# Altium PCB LVDS2RGB.PcbDoc
Units mm, origin at the board's own origin, x right, y up, seen from the top; angles counter-clockwise.
Board outline 34.16 x 35.56 mm, 2 copper layers (Top Layer, Bottom Layer); 35 components, 62 nets, 174 pads, 20 vias.
Unrouted connection lines stored in the file: 35.
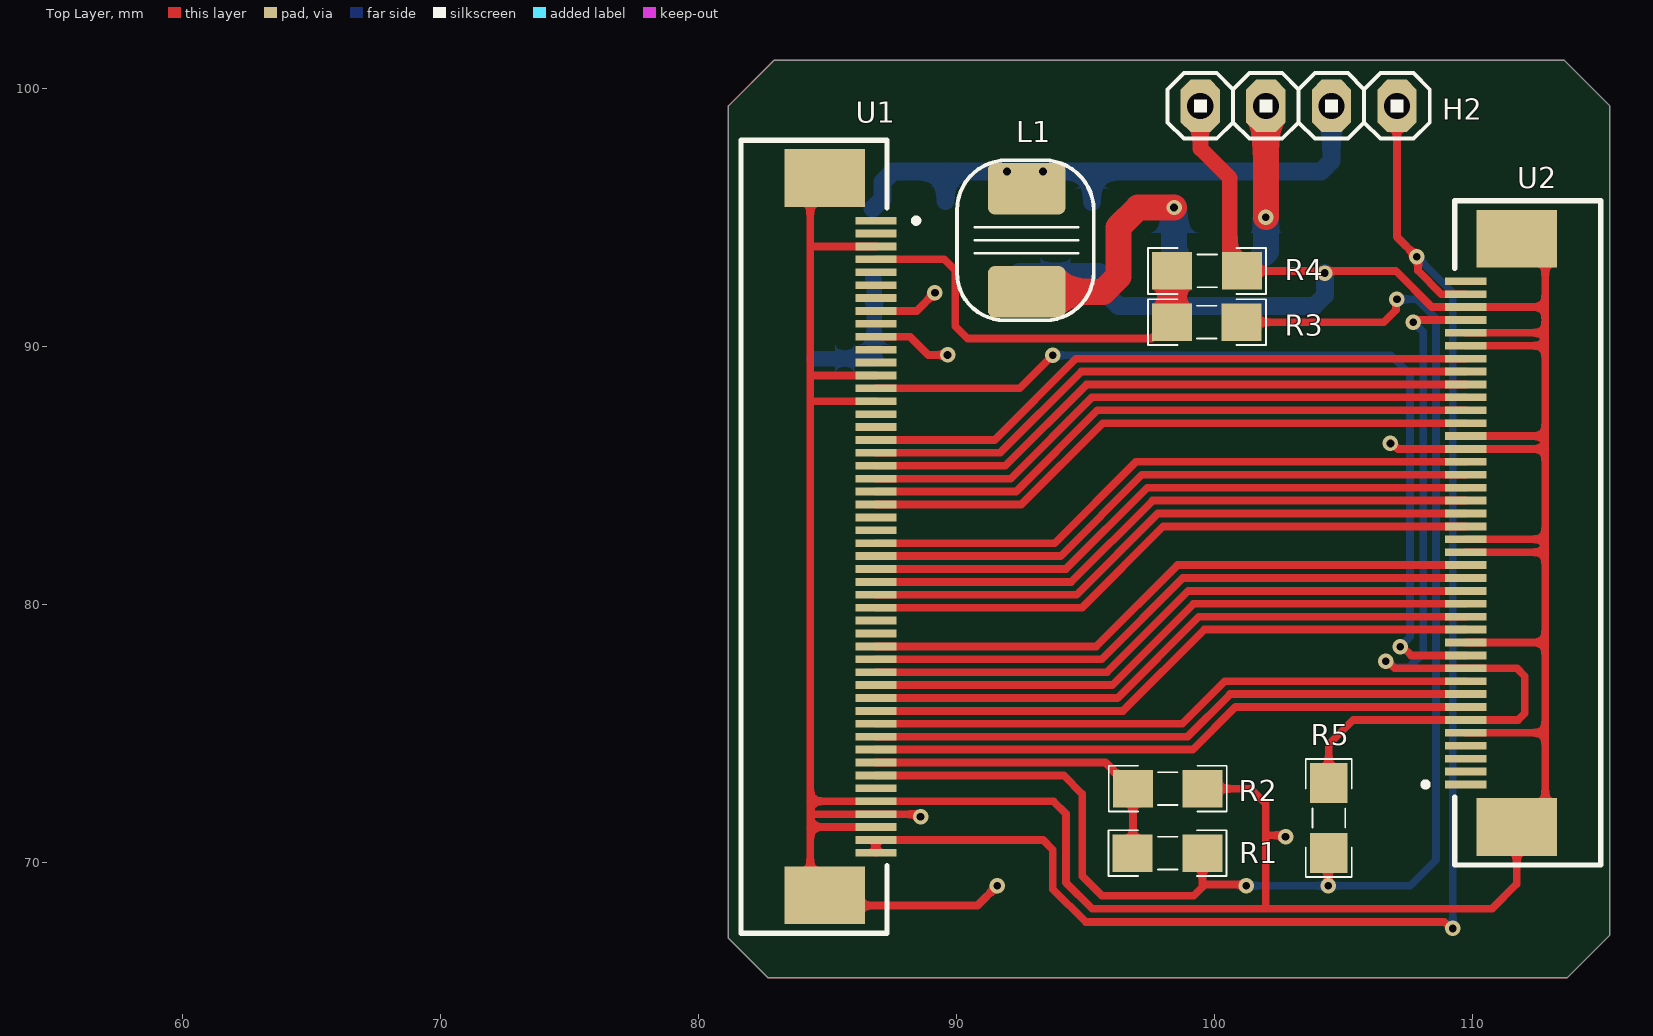
[diagram p0: Top Layer view]
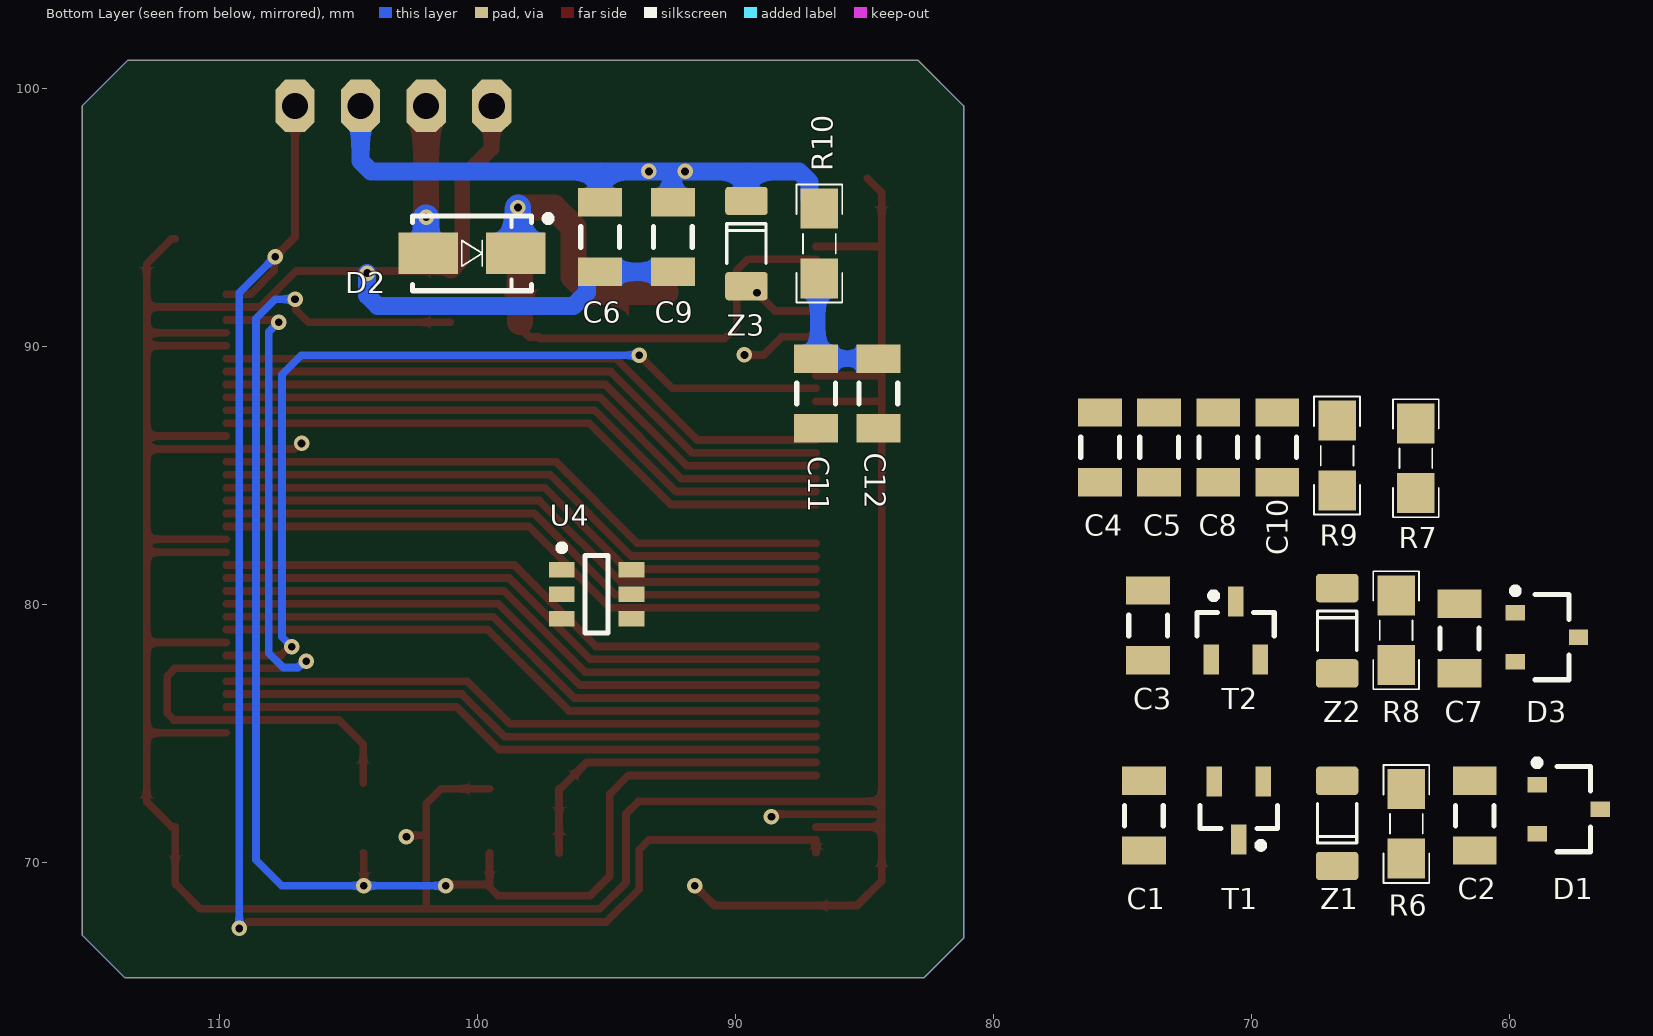
[diagram p1: Bottom Layer view, seen from below]

## Layer stack, top to bottom
Top Solder: solder mask 0.0102, Solder Resist, Dk 3.5
Top Layer: signal copper 0.0356
Dielectric 1: dielectric 0.32, FR-4, Dk 4.8
Bottom Layer: signal copper 0.0356
Bottom Solder: solder mask 0.0102, Solder Resist, Dk 3.5

## Board outline
81.153,67.056 82.677,65.532 113.665,65.532 115.316,67.183 115.316,99.314 113.538,101.092 82.931,101.092 81.153,99.314

## Design rules (kind name [scope] priority, off if disabled: settings)
Clearance [All] p1: gap=0.2 ignorepadtopadclearanceinfootprint=FALSE except(0.4: Arc-Fill Arc-Poly Arc-Region Track-Fill Track-Poly Track-Region SMDPad-Fill SMDPad-Poly SMDPad-Region THPad-Fill THPad-Poly THPad-Region Via-Fill Via-Poly Via-Region Fill-Fill Fill-Poly Fill-Region Poly-Poly Poly-Region Region-Region)
ComponentClearance [All] p1 off: gap=0.254 collisioncheckmode=3 verticalgap=0.254 showdistances=FALSE
PolygonConnect [All] p1: connectstyle=Relief reliefconductorwidth=0.254 reliefentries=4 polygonreliefangle="90 Angle" airgapwidth=0.254
RoutingVias [All] p1: holewidth=0.6 width=0.3 viastyle="Through Hole" minholewidth=0.1 minwidth=0.1 maxholewidth=10 maxwidth=10
SolderMaskExpansion [All] p1: expansion=0.102 istentingtop=FALSE
Width [All] p1: maxlimit=10 minlimit=0.1 preferedwidth=0.3
29 further rules are at their usual default settings.

## Components (designator, comment, footprint, x,y, rotation, side; value= is the part's Value field where it differs from the comment)
C1 "Comment" MY_CAP_SMD_1206 74.168,71.809 r90 bottom
C2 "Comment" MY_CAP_SMD_1206 61.341,71.809 r270 bottom
C3 "Comment" MY_CAP_SMD_1206 74,79.183 r270 bottom
C4 "Comment" MY_CAP_SMD_1206 75.864,86.084 r90 bottom
C5 "Comment" MY_CAP_SMD_1206 73.575,86.084 r90 bottom
C6 "Comment" MY_CAP_SMD_1206 95.241,94.234 r90 bottom
C7 "Comment" MY_CAP_SMD_1206 61.935,78.675 r270 bottom
C8 "Comment" MY_CAP_SMD_1206 71.285,86.084 r90 bottom
C9 "Comment" MY_CAP_SMD_1206 92.417,94.234 r90 bottom
C10 "Comment" MY_CAP_SMD_1206 68.996,86.084 r90 bottom
C11 "Comment" MY_CAP_SMD_1206 86.868,88.169 r90 bottom
C12 "Comment" MY_CAP_SMD_1206 84.455,88.169 r90 bottom
D1 "Comment" SOT95P230X110-3N 57.703,72.061 r180 bottom
D2 "Comment" DIOM4629X24N 100.203,93.599 r180 bottom
D3 "Comment" SOT95P230X110-3N 58.547,78.723 r180 bottom
H2 "Comment" My_1X04 103.251,99.314 r0 top
L1 "Comment" "Inductor SMD 3x3.2mm" 92.71,94.107 r90 top
R1 "Comment" RESC3413X04N 98.171,70.358 r0 top
R2 "Comment" RESC3413X04N 98.179,72.853 r0 top
R3 "Comment" RESC3413X04N 99.695,90.932 r0 top
R4 "Comment" RESC3413X04N 99.703,92.919 r0 top
R5 "Comment" RESC3413X04N 104.419,71.718 r90 top
R6 "Comment" RESC3413X04N 63.993,71.49 r90 bottom
R7 "Comment" RESC3413X04N 63.627,85.661 r270 bottom
R8 "Comment" RESC3413X04N 64.389,78.994 r270 bottom
R9 "Comment" RESC3413X04N 66.678,85.765 r270 bottom
R10 "Comment" RESC3413X04N 86.741,93.98 r90 bottom
T1 "Comment" SOT23_N 70.485,72.009 r270 bottom
T2 "Comment" SOT23_N 70.612,78.983 r90 bottom
U1 "Comment" SAMTEC_ZF5S-50-01-T-WT 84.888,82.618 r270 top locked
U2 "Comment" SAMTEC_ZF5S-40-02-T-WT 111.708,82.769 r90 top locked
U4 "Comment" MT368 95.377,80.391 r180 bottom
Z1 "Comment" "SOD80, LL-34" 66.675,71.509 r90 bottom
Z2 "Comment" "SOD80, LL-34" 66.675,78.975 r270 bottom
Z3 "Comment" "SOD80, LL-34" 89.568,93.98 r270 bottom

## Footprints (in the part's own frame and the unit in brackets; to place one, negate y for a bottom-side part, rotate by r counter-clockwise, add the part's x,y. Pads: shape width x height; smd on the part's side, far side on the other; paste and mask are expansions set on the pad)
DIOM4629X24N [mm] "Molded Diode, 2-Leads, Body 4/60x2/90mm, IPC Medium Density-Design:Abbas Basereh"
  rect 2.3x1.6 smd: 1(-1.7,0) 2(1.7,0)
  silkscreen extent -2.3,-1.45 3.07,1.47, body extent -2.5,-1.22 2.5,1.48, height 2.2
"Inductor SMD 3x3.2mm" [mm] "Inductor 4.7µH SMD 3x3.2mm"
  round 0.508 on Mech15: 0(0,0)
  rrect25% 2x3 smd: 1(-2,0) 2(2,0)
  silkscreen extent -3.1,-2.6 3.1,2.7, body extent -2.9,-2.6 2.89,2.6, height 4.5
MT368 [mm] "SOT23, 6-Leads, Body 2.90x2.80mm, Pitch 0.95mm, IPC Medium Density"
  rect 1x0.6 smd: 1(-1.35,0.95) 2(-1.35,0) 3(-1.35,-0.95) 4(1.35,-0.95) 5(1.35,0) 6(1.35,0.95)
  silkscreen extent -1.48,-1.5 0.45,1.92, body extent -1.5,-1.5 1.5,1.5, height 1.45
My_1X04 [mil]
  oct 60x80 hole 40: 1(-150,0) 2(-50,0) 3(50,0) 4(150,0)
  silkscreen extent -200,-50 200,50, body extent -198,-49 202,51, height 234
MY_CAP_SMD_1206 [mm]
  rect 1.1x1.7 smd: 1(-1.35,0) 2(1.35,0)
  silkscreen extent -0.4,-0.75 0.4,0.75, body extent -1.52,-0.76 1.68,0.84, height 1.2
RESC3413X04N [mm] "Chip Resistor, 2-Leads, Body 3/40x1/30mm, IPC Medium Density-Design:Abbas Basereh"
  rect 1.55x1.45 smd: 1(-1.35,0) 2(1.35,0)
  silkscreen extent -2.29,-0.89 2.29,0.89, body extent -1.25,-0.62 1.25,0.62, height 0.79
SAMTEC_ZF5S-40-02-T-WT [mm]
  rect 0.3x1.6 smd: 01(-9.75,1.98) 02(-9.25,1.98) 03(-8.75,1.98) 04(-8.25,1.98) 05(-7.75,1.98) 06(-7.25,1.98) 07(-6.75,1.98) 08(-6.25,1.98) 09(-5.75,1.98) 10(-5.25,1.98) 11(-4.75,1.98) 12(-4.25,1.98) 13(-3.75,1.98) 14(-3.25,1.98) 15(-2.75,1.98) 16(-2.25,1.98) 17(-1.75,1.98) 18(-1.25,1.98) 19(-0.75,1.98) 20(-0.25,1.98) 21(0.25,1.98) 22(0.75,1.98) 23(1.25,1.98) 24(1.75,1.98) 25(2.25,1.98) 26(2.75,1.98) 27(3.25,1.98) 28(3.75,1.98) 29(4.25,1.98) 30(4.75,1.98) 31(5.25,1.98) 32(5.75,1.98) 33(6.25,1.98) 34(6.75,1.98) 35(7.25,1.98) 36(7.75,1.98) 37(8.25,1.98) 38(8.75,1.98) 39(9.25,1.98) 40(9.75,1.98)
  rect 2.24x3.12 smd: S1(-11.397,0) S2(11.397,0)
  silkscreen extent -12.87,-3.25 12.87,3.64
SAMTEC_ZF5S-50-01-T-WT [mm]
  rect 0.3x1.6 smd: 01(-12.25,1.98) 02(-11.75,1.98) 03(-11.25,1.98) 04(-10.75,1.98) 05(-10.25,1.98) 06(-9.75,1.98) 07(-9.25,1.98) 08(-8.75,1.98) 09(-8.25,1.98) 10(-7.75,1.98) 11(-7.25,1.98) 12(-6.75,1.98) 13(-6.25,1.98) 14(-5.75,1.98) 15(-5.25,1.98) 16(-4.75,1.98) 17(-4.25,1.98) 18(-3.75,1.98) 19(-3.25,1.98) 20(-2.75,1.98) 21(-2.25,1.98) 22(-1.75,1.98) 23(-1.25,1.98) 24(-0.75,1.98) 25(-0.25,1.98) 26(0.25,1.98) 27(0.75,1.98) 28(1.25,1.98) 29(1.75,1.98) 30(2.25,1.98) 31(2.75,1.98) 32(3.25,1.98) 33(3.75,1.98) 34(4.25,1.98) 35(4.75,1.98) 36(5.25,1.98) 37(5.75,1.98) 38(6.25,1.98) 39(6.75,1.98) 40(7.25,1.98) 41(7.75,1.98) 42(8.25,1.98) 43(8.75,1.98) 44(9.25,1.98) 45(9.75,1.98) 46(10.25,1.98) 47(10.75,1.98) 48(11.25,1.98) 49(11.75,1.98) 50(12.25,1.98)
  rect 2.24x3.12 smd: S1(-13.897,0) S2(13.897,0)
  silkscreen extent -15.37,-3.25 15.37,3.64
"SOD80, LL-34" [mm] "Diode, MiniMELF"
  round 0.5 on Mech15: 0(0,0)
  rrect25% 1.1x1.65 smd: 1(1.65,0) 2(-1.65,0)
  silkscreen extent -0.76,-0.76 0.76,0.76, body extent -1.88,-0.8 1.82,0.8, height 1.6
SOT23_N [mm] "SOT23, 3-Leads, Body 2.9x1.3mm, Pitch 0.95mm, Lead Span 2.3mm - Reverse Pinning, IPC Medium Density"
  rect 1.15x0.6 smd: 1(1.125,0) 2(-1.125,-0.95) 3(-1.125,0.95)
  silkscreen extent -0.2,-1.5 1.47,1.5, body extent -0.7,-1.5 0.7,1.5, height 1.1
SOT95P230X110-3N [mm] "SOT23, 3-Leads, Body 3.30x2.30mm, Pitch 0.95mm, IPC Medium Density"
  rect 0.75x0.6 smd: 1(-1.225,0.95) 2(-1.225,-0.95) 3(1.225,0)
  silkscreen extent -1.35,-1.65 0.85,1.92, body extent -0.85,-1.65 0.85,1.65, height 1.1

## Part data
D1 D3: "BAT54S"
T1: "BC857"
T2: "BC850"

## Via types
v1: diameter 0.6, hole 0.3, Top Layer to Bottom Layer, tented both sides, 19 vias
v2: diameter 0.6, hole 0.3, Top Layer to Bottom Layer, 1 vias

## Nets (pads, with @x,y where several pads share a name; then routed paths per layer and width w, separated by ;. In a path a pad name is that pad's centre, name@x,y a point inside that pad or via, vN(x,y) a via of type N, cw(c..) or ccw(c..) an arc to the next point about the centre after c; other vN are vias at no path point)
3V3: R1.2 R3.2 R5.1 U1.44 | length 58
  Top Layer w0.3: U1.44 94.145,73.368 94.869,72.644 94.869,69.469 95.631,68.707 99.187,68.707 99.521,69.041 ; R1.2 99.521,69.145 101.162,69.145 v1(101.219,69.088) ; R3.2 106.553,90.932 107.021,91.4 107.021,91.781 v1(107.061,91.821) ; v1(104.394,69.088) 104.394,70.343 R5.1
  Bottom Layer w0.3: v1(101.219,69.088) v1(104.394,69.088) 107.569,69.088 108.577,70.096 108.577,91.067 107.823,91.821 v1(107.061,91.821)
9V: 
12V: C6.2 C9.2 H2.3 L1.2 R10.2 Z3.2 | length 24.5
  Bottom Layer w0.7: R10.2 87.116,95.705 87.116,96.364 87.526,96.774 89.568,96.774 ; Z3.2 89.568,96.774 ; C9.2 92.456,95.623 92.456,96.774 ; C6.2 95.241,96.774 ; H2.3@104.521,99.187 104.521,97.184 104.111,96.774 95.241,96.774 ; 89.568,96.774 v1(91.948,96.774) 92.456,96.774 ; 92.456,96.774 v1(93.345,96.774) 95.241,96.774
AVDD: C4.2 C5.2 C8.2 C10.2 D3.1 R9.1 U1.08 Z3.1 | length 2.6
  Top Layer w0.3: U1.08 88.447,91.368 v1(89.154,92.075)
BLUE0: U1.39 U2.13 | length 24.2
  Top Layer w0.3: U1.39 96.442,75.868 99.593,79.019 U2.13
BLUE1: U1.38 U2.14 | length 24.2
  Top Layer w0.3: U1.38 96.235,76.368 99.386,79.519 U2.14
BLUE2: U1.37 U2.15 | length 24.2
  Top Layer w0.3: U1.37 96.028,76.868 99.179,80.019 U2.15
BLUE3: U1.36 U2.16 | length 24.2
  Top Layer w0.3: U1.36 95.821,77.368 98.972,80.519 U2.16
BLUE4: U1.35 U2.17 | length 24.2
  Top Layer w0.3: U1.35 95.614,77.868 98.765,81.019 U2.17
BLUE5: U1.34 U2.18 | length 24.2
  Top Layer w0.3: U1.34 95.406,78.368 98.557,81.519 U2.18
BLUE6: U1.33
BLUE7: U1.32
BLUE8: 
BLUE9: 
DCLK: U1.14 U2.11 | length 34.9
  Top Layer w0.3: U1.14 92.447,88.368 v1(93.726,89.647) ; v1(107.188,78.359) 107.269,78.359 107.609,78.019 U2.11
  Bottom Layer w0.3: v1(93.726,89.647) 106.822,89.647 107.569,88.9 107.569,78.74 v1(107.188,78.359)
DE: U1.42 U2.07 | length 23.5
  Top Layer w0.3: U1.42 99.15,74.368 100.801,76.019 U2.07
DITHB: R3.1 R4.1 U1.04 | length 16.6
  Top Layer w0.3: U1.04 89.512,93.368 89.939,92.941 89.939,90.782 90.424,90.297 97.544,90.297 97.604,90.357 97.977,90.357 R3.1@98.669,91.049
  Top Layer w1: R3.1 R4.1@98.345,92.912
EM1: C2.2 D1.1 R6.1 T1.1
EM2: C7.2 D3.2 R8.1 T2.1
GND: C1.1 C2.1 C3.1 C4.1 C5.1 C6.1 C7.1 C8.1 C9.1 C10.1 D1.2 H2.1 R2.2 R4.2 R7.2 U1.03 U1.13 U1.15 U1.46 U1.47 U1.48 U1.S1 U1.S2 U2.05 U2.12 U2.19 U2.20 U2.27 U2.28 U2.35 U2.36 U2.38 U2.S1 U2.S2 Z1.2 Z2.2 | length 175.4
  Top Layer w0.3: U1.S1 84.328,95.955 84.328,93.853 ; U1.48 84.328,71.368 ; U1.15 84.344,87.868 84.328,87.884 ; U1.13 84.36,88.868 84.328,88.9 ; U1.03 84.343,93.868 84.328,93.853 ; v1(88.601,71.769) 88.52,71.769 88.42,71.868 U1.47 84.342,71.868 84.328,71.882 ; v1(91.567,69.088) 90.805,68.326 85.283,68.326 84.328,69.281 84.328,71.368 ; R2.2 101.391,72.853 101.981,72.263 101.981,71.12 ; R4.2 104.267,92.919 107.01,92.919 108.41,91.519 U2.38 112.81,91.519 ; v1(102.743,70.993) 102.686,71.05 102.051,71.05 101.981,71.12 ; v1(106.807,86.233) 106.888,86.233 107.102,86.019 U2.27 112.81,86.019 ; U2.05 112.81,75.019 ; U2.12 112.81,78.519 ; U2.19 112.81,82.019 ; U2.20 112.81,82.519 ; U2.28 112.81,86.519 ; U2.35 112.81,90.019 ; U2.36 112.81,90.519 ; U2.S2 111.84,94.166 112.81,93.196 112.81,91.519 ; 84.328,71.368 84.328,71.882 ; 84.328,71.882 84.328,72.368 ; 84.328,72.368 U1.46 93.748,72.368 94.234,71.882 94.234,69.215 95.25,68.199 101.981,68.199 ; 84.328,72.368 84.328,87.884 ; 84.328,87.884 84.328,88.9 ; 84.328,88.9 84.328,93.853 ; 101.981,68.199 101.981,71.12 ; 101.981,68.199 110.744,68.199 111.708,69.163 U2.S1 111.84,71.372 112.81,72.342 112.81,75.019 ; 112.81,75.019 112.81,78.519 ; 112.81,78.519 112.81,82.019 ; 112.81,82.019 112.81,82.519 ; 112.81,82.519 112.81,86.019 ; 112.81,86.019 112.81,86.519 ; 112.81,86.519 112.81,90.019 ; 112.81,90.019 112.81,90.519 ; 112.81,90.519 112.81,91.519
  Top Layer w0.6: H2.1@99.441,99.187 99.441,97.663 100.584,96.52 100.584,93.344 101.009,92.919 R4.2
  Bottom Layer w0.7: C9.1 95.541,92.884 95.741,92.684 95.741,92.092 96.266,91.567 103.857,91.567 104.267,91.977 v1(104.267,92.837)
GREEN0: U1.31 U2.21 | length 24.2
  Top Layer w0.3: U1.31 94.854,79.868 98.005,83.019 U2.21
GREEN1: U1.30 U2.22 | length 24.2
  Top Layer w0.3: U1.30 94.647,80.368 97.798,83.519 U2.22
GREEN2: U1.29 U2.23 | length 24.2
  Top Layer w0.3: U1.29 94.44,80.868 97.591,84.019 U2.23
GREEN3: U1.28 U2.24 | length 24.2
  Top Layer w0.3: U1.28 94.233,81.368 97.384,84.519 U2.24
GREEN4: U1.27 U2.25 | length 24.2
  Top Layer w0.3: U1.27 94.026,81.868 97.177,85.019 U2.25
GREEN5: U1.26 U2.26 | length 24.2
  Top Layer w0.3: U1.26 93.798,82.368 96.949,85.519 U2.26
GREEN6: U1.25
GREEN7: U1.24
GREEN8: 
HSYNC: U1.40 U2.09 | length 23.5
  Top Layer w0.3: U1.40 98.736,75.368 100.387,77.019 U2.09
LEDA: H2.4 U1.49 U1.50 U2.39 | length 60.7
  Top Layer w0.3: U1.50 U1.49 93.343,70.868 93.726,70.485 93.726,68.961 94.996,67.691 108.894,67.691 109.148,67.437 v1(109.22,67.437) ; H2.4 107.061,94.234 v1(107.823,93.472) 107.88,93.415 107.88,92.922 108.783,92.019 U2.39
  Bottom Layer w0.3: v1(107.823,93.472) 109.22,92.075 v1(109.22,67.437)
LR: U1.12
MODE: R1.1 R2.1 U1.43 | length 12.9
  Top Layer w0.3: U1.43 95.764,73.868 96.779,72.853 R2.1 96.829,70.366 R1.1
MOE: 
NET1: C11.2 C12.2 R10.1 | length 5.6
  Bottom Layer w0.6: C12.2 C11.2 86.804,89.582 86.804,92.567 R10.1
NET2: R7.1 R9.2
NET3: C11.1 D3.3
NET4: C12.1 D1.3
NET5: R6.2 T1.3 Z1.1
NET6: R8.2 T2.3 Z2.1
RED0: U1.23 U2.29 | length 24.2
  Top Layer w0.3: U1.23 92.504,83.868 95.655,87.019 U2.29
RED1: U1.22 U2.30 | length 24.2
  Top Layer w0.3: U1.22 92.297,84.368 95.448,87.519 U2.30
RED2: U1.21 U2.31 | length 24.2
  Top Layer w0.3: U1.21 92.09,84.868 95.241,88.019 U2.31
RED3: U1.20 U2.32 | length 24.2
  Top Layer w0.3: U1.20 91.883,85.368 95.034,88.519 U2.32
RED4: U1.19 U2.33 | length 24.2
  Top Layer w0.3: U1.19 91.676,85.868 94.827,89.019 U2.33
RED5: U1.18 U2.34 | length 24.2
  Top Layer w0.3: U1.18 91.468,86.368 94.619,89.519 U2.34
RED6: U1.17
RED7: U1.16
RED8: 
RESET: U1.07
UD: U1.11
VCC: R5.2 U2.06 U2.10 U2.37 | length 33.5
  Top Layer w0.3: R5.2 104.419,74.574 105.364,75.519 U2.06 111.76,75.519 112.014,75.773 112.014,77.216 111.711,77.519 106.978,77.519 106.703,77.793 v1(106.622,77.793) ; v1(107.696,90.932) 107.777,90.932 107.864,91.019 U2.37
  Bottom Layer w0.3: v1(106.622,77.793) 106.703,77.793 106.946,77.55 107.522,77.55 108.077,78.105 108.077,90.551 v1(107.696,90.932)
VGH: C3.2 T2.2 U1.10 | length 2.8
  Top Layer w0.3: U1.10@87.122,90.368 88.189,90.368 88.895,89.662 v1(89.647,89.662)
VGL: C1.2 T1.2 U1.09
VIN: D2.1 H2.2 | length 5.7
  Top Layer w1: v1(101.981,94.996) H2.2@101.981,99.187
  Bottom Layer w1: D2.1 101.981,93.677 v1(101.981,94.996) ; H2.2@101.942,99.148 H2.2@101.981,99.187
VS: D2.2 L1.1 | length 10
  Top Layer w1: L1.1 95.68,92.107 96.266,92.693 96.266,94.615 97.028,95.377 v2(98.425,95.377)
  Bottom Layer w1: v2(98.425,95.377) 98.425,93.677 D2.2
VSYNC: U1.41 U2.08 | length 23.5
  Top Layer w0.3: U1.41 98.943,74.868 100.594,76.519 U2.08
X1: U2.04
X2: U2.02
X3: 
Y1: U2.03
Y2: U2.01
pads on no net: L1.0 U1.01 U1.02 U1.05 U1.06 U1.45 U2.40 U4.1 U4.2 U4.3 U4.4 U4.5 U4.6 Z1.0 Z2.0 Z3.0

## Polygon pours and split planes (outlines as drawn)
GND on Top Layer "NONET_L01_P000" (solid, shelved, pour order 0): 81.153,67.056 82.677,65.532 113.665,65.532 115.316,67.183 115.316,99.314 113.538,101.092 82.931,101.092 81.153,99.314
GND on Bottom Layer "NONET_L02_P001" (solid, shelved, pour order 1): 81.153,67.056 82.677,65.532 113.665,65.532 115.316,67.183 115.316,99.314 113.538,101.092 82.931,101.092 81.153,99.314

## Silkscreen, mask and mechanical layers (free items; w line width, h text height)
Mechanical 1:
  lines w0.3: 115.316,99.314 115.316,67.183 113.665,65.532 82.677,65.532 81.153,67.056 81.153,99.314 82.931,101.092 113.538,101.092 115.316,99.314 ; 115.316,99.314 115.316,99.314